# EAGLE board Short-round to Regular Header (EAGLE 6.5.0)
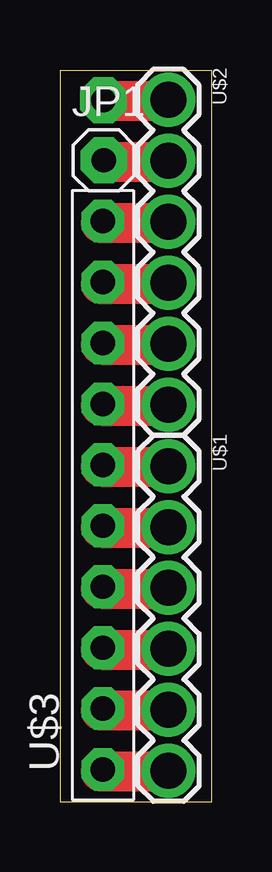
[diagram p0: board, top side]
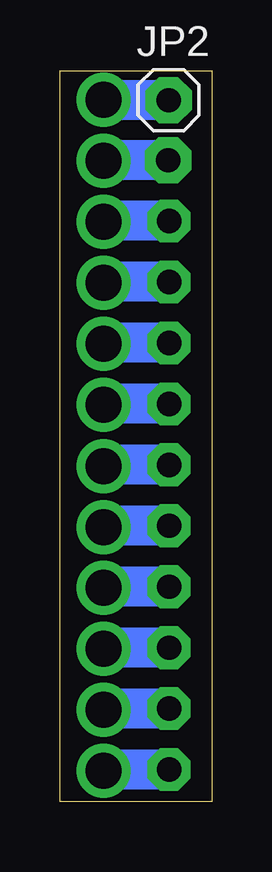
[diagram p1: board, bottom side, seen from below]

Size 6.35 x 30.47 mm. Coordinates in mm from the lower left corner, seen from the top.
Outline: 0,0 6.35,0 6.35,30.47 0,30.47 0,0
Copper layers (1*16): Top 0.035mm / dielectric 1.5mm / Bottom 0.035mm
Design rules "default": minimum track width 10mil, minimum drill 24mil, track to track 8mil, track to pad 8mil, pad to pad 8mil, via to via 8mil, smd to smd 8mil, copper to edge 40mil, drill to drill 8mil, minimum pad ring 10mil, minimum via ring 8mil, stop-mask expansion 4mil, vias tented up to drill 0mil, thermal gap 10mil

## Footprints (pad centres in the part's own frame; a part is rotated, then mirrored left to right if it is on the bottom)
1X01 = drill 1.016 pad 1.93 octagon: 1 0,0
1X6_SHORT_ROUND = drill 1.5 pad 2.2: 1 1.27,-1.27; 2 3.81,-1.27; 3 6.35,-1.27; 4 8.89,-1.27; 5 11.43,-1.27; 6 13.97,-1.27
1X10-BIG = drill 1.016 pad 1.778 octagon: 1 -11.43,0; 2 -8.89,0; 3 -6.35,0; 4 -3.81,0; 5 -1.27,0; 6 1.27,0; 7 3.81,0; 8 6.35,0; 9 8.89,0; 10 11.43,0

## Placement (x,y rotation side)
JP1  [1X01]  1.83,26.73 0 top
JP2  [1X01]  1.82,29.24 0 bottom
U$1  1X6_SHORT_ROUND  [1X6_SHORT_ROUND]  5.8,15.27 270 top
U$2  1X6_SHORT_ROUND  [1X6_SHORT_ROUND]  5.8,30.53 270 top
U$3  PINHD-1X10  [1X10-BIG]  1.79,12.78 90 top

## Library data of the parts
JP1 JP2 U$3 = adafruit
U$1 U$2 = Random parts(01-14-14)

## Nets
N$1: U$1.6 U$3.1
N$2: U$1.5 U$3.2
N$3: U$1.4 U$3.3
N$4: U$1.3 U$3.4
N$5: U$1.2 U$3.5
N$6: U$1.1 U$3.6
N$7: U$2.6 U$3.7
N$8: U$2.5 U$3.8
N$9: U$2.4 U$3.9
N$10: U$2.3 U$3.10
N$11: JP1.1 U$2.2
N$12: JP2.1 U$2.1

## Tracks (layer width: path | path; a pad name or v marks a point on that pad's centre or on a via)
N$1
  Bottom 0.406: 4.53,1.35 U$1.6
  Bottom 1.676: U$3.1 4.53,1.35
N$2
  Bottom 0.406: 4.53,3.89 U$1.5
  Bottom 1.676: U$3.2 4.53,3.89
N$3
  Bottom 0.406: 4.53,6.43 U$1.4
  Bottom 1.676: U$3.3 4.53,6.43
N$4
  Bottom 0.406: 4.53,8.97 U$1.3
  Bottom 1.676: U$3.4 4.53,8.97
N$5
  Bottom 0.406: 4.53,11.51 U$1.2
  Bottom 1.676: U$3.5 4.53,11.51
N$6
  Bottom 0.406: 4.53,14.05 U$1.1
  Bottom 1.676: U$3.6 4.53,14.05
N$7
  Bottom 0.406: 4.53,16.59 U$2.6
  Bottom 1.676: U$3.7 4.53,16.59
N$8
  Bottom 0.406: 4.53,19.13 U$2.5
  Bottom 1.676: U$3.8 4.53,19.13
N$9
  Bottom 0.406: 4.53,21.67 U$2.4
  Bottom 1.676: U$3.9 4.53,21.67
N$10
  Bottom 0.406: 4.53,24.21 U$2.3
  Bottom 1.676: U$3.10 4.53,24.21
N$11
  Bottom 0.406: 4.53,26.73 U$2.2
  Bottom 1.676: JP1.1 4.53,26.73
N$12
  Bottom 0.406: 4.53,29.24 U$2.1
  Bottom 1.676: JP2.1 4.53,29.24
N$13
  Top 1.676: 1.72,3.81 4.26,3.81
N$14
  Top 1.676: 1.72,6.35 4.26,6.35
N$15
  Top 1.676: 1.72,8.89 4.26,8.89
N$16
  Top 1.676: 1.72,11.43 4.26,11.43
N$17
  Top 1.676: 1.72,13.97 4.26,13.97
N$18
  Top 1.676: 1.72,16.51 4.26,16.51
N$19
  Top 1.676: 1.72,19.05 4.26,19.05
N$20
  Top 1.676: 1.72,21.59 4.26,21.59
N$21
  Top 1.676: 1.72,24.13 4.26,24.13
N$22
  Top 1.676: 1.72,26.67 4.26,26.67
N$23
  Top 1.676: 1.72,29.21 4.26,29.21
N$24
  Top 1.676: 1.72,1.27 4.26,1.27